# Altium PCB ESP_mudule.pcbdoc (part 2 of 4)
Units mm, origin at the board's own origin, x right, y up, seen from the top; angles counter-clockwise.
Board outline 109.8 x 135.65 mm, 2 copper layers (Top Layer, Bottom Layer); 176 components, 188 nets, 748 pads, 392 vias.
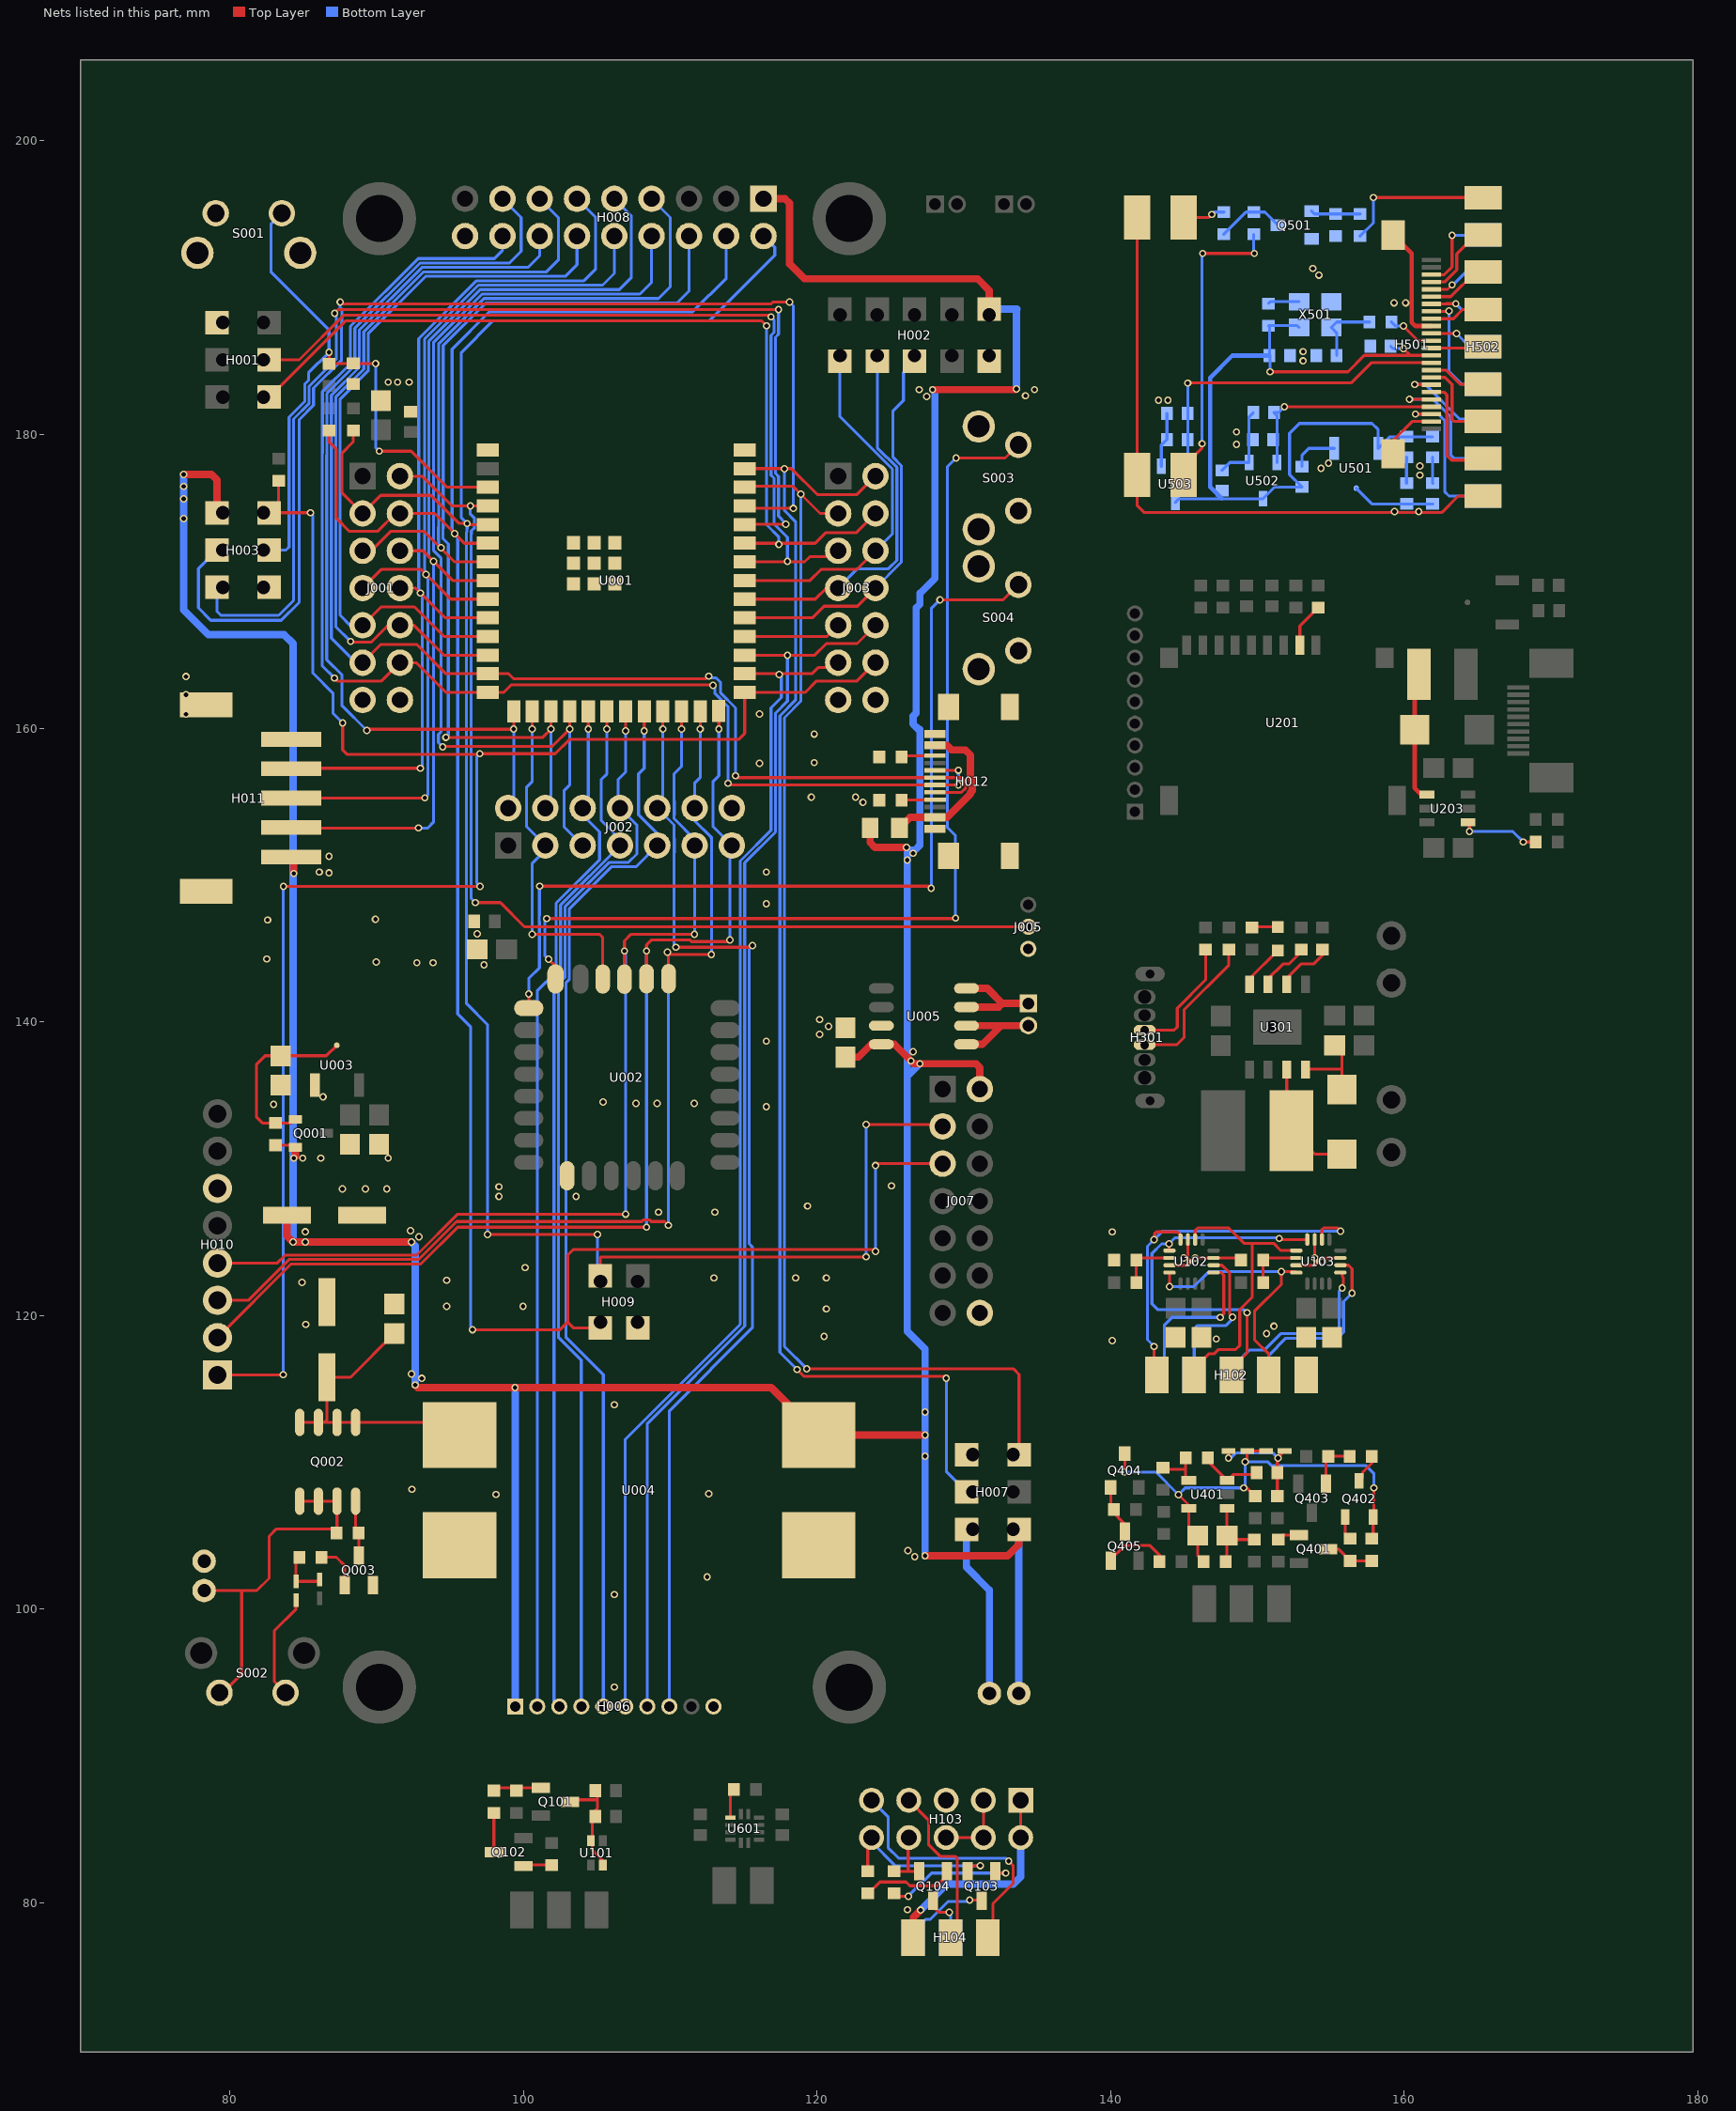
[diagram p2: the nets of this part, all layers, seen from the top]

## Via types
v1: diameter 0.5, hole 0.305, Top Layer to Bottom Layer, 390 vias
v2: diameter 0.61, hole 0.305, Top Layer to Bottom Layer, 2 vias

## Nets (pads, with @x,y where several pads share a name; then routed paths per layer and width w, separated by ;. In a path a pad name is that pad's centre, name@x,y a point inside that pad or via, vN(x,y) a via of type N, cw(c..) or ccw(c..) an arc to the next point about the centre after c; other vN are vias at no path point)
$1N5617: C007.2 Q001.1 R002.2 U003.2 | length 12.5
  Top Layer w0.2: Q001.1@84.481,133.362 84.228,133.109 R002.2@83.139,133.109 82.236,133.109 81.822,133.523 81.822,137.093 82.419,137.691 C007.2@83.474,137.691 86.588,137.691 U003.2@87.303,138.406
$1N9021: H007.2 L001.2 | length 11.8
  Bottom Layer w0.5: H007.2@130.203,105.449 130.17,105.417 130.17,102.872 131.742,101.3 L001.2@131.742,94.278
$1N9369: Q002.4 Q003.3 R003.1 | length 3.8
  Top Layer w0.2: Q002.4@88.585,107.36 88.585,105.403 R003.1@88.792,105.195 88.801,105.187 Q003.3@88.801,103.655
$1N9446: Q003.1 R004.1 | length 3.1
  Top Layer w0.2: R004.1@86.252,103.544 87.269,103.544 87.851,102.963 Q003.1@87.851,101.655
$1N9668: D001.1 D002.1 R004.2 | length 3.4
  Top Layer w0.2: R004.2@84.746,103.544 84.522,103.321 D002.1@84.522,101.897 86.011,101.897 D001.1@86.134,102.02
$1N9696: J004.1 Q002.1 Q002.2 Q002.3 R003.2 S002.1 | length 25
  Top Layer w0.2: J004.1@78.265,101.274 80.819,101.274 ; S002.1@79.312,94.322 79.545,94.322 80.819,95.596 80.819,101.274 ; Q002.1@84.775,107.36 Q002.2@86.045,107.36 Q002.3@87.315,107.36 87.315,105.225 R003.2@87.286,105.195 87.008,105.473 83.199,105.473 82.689,104.963 82.689,102.107 81.855,101.274 80.819,101.274
$1N18392: H012.A5 R008.2 | length 2.3
  Top Layer w0.2: R008.2@125.749,155.106 128.041,155.106 H012.A5@128.051,155.116
$1N18402: F001.2 H012.A4B9 H012.B4A9 | length 11.2
  Top Layer w0.5: F001.2@125.615,153.201 126.34,153.926 H012.A4B9@128.037,153.926 128.858,153.926 130.457,155.525 130.457,155.605 130.585,155.733 130.585,156.524 130.457,156.652 130.457,158.154 130.097,158.514 129.17,158.514 128.858,158.826 H012.B4A9@128.037,158.826
$1N18404: H012.B5 R009.2 | length 2.3
  Top Layer w0.2: R009.2@125.749,158.027 125.848,158.126 H012.B5@128.037,158.126
$1N20301: J006.1 U005.7 U005.8 | length 7.2
  Top Layer w0.5: U005.7@130.183,141.009 132.386,141.009 132.628,141.251 ; U005.8@130.183,142.279 131.6,142.279 132.628,141.251 ; J006.1@134.393,141.251 132.628,141.251
$1N20305: J006.2 U005.5 U005.6 | length 7.1
  Top Layer w0.5: U005.5@130.183,138.469 131.263,138.469 132.533,139.739 ; U005.6@130.183,139.739 132.533,139.739 ; J006.2@134.395,139.751 134.383,139.739 132.533,139.739
$1N20758: D002.2 S002.2 | length 7.2
  Top Layer w0.2: S002.2@83.812,94.322 83.046,95.088 83.046,98.537 84.522,100.013 D002.2@84.522,100.627
$2N358: C101.2 C102.2 Q101.3 U101.2 U101.5 | length 7.5
  Top Layer w0.2: Q101.3@103.188,86.896 103.319,87.027 105.059,87.027 ; C102.2@104.917,87.658 105.059,87.516 105.059,87.027 ; U101.2@105.421,82.578 105.421,82.884 104.702,83.603 104.702,86.102 105.059,86.459 105.059,87.027
$2N709: Q101.1 R101.1 R102.2 | length 3.3
  Top Layer w0.2: R102.2@97.997,87.649 98.194,87.846 Q101.1@101.188,87.846
$2N810: Q102.3 R102.1 | length 2.7
  Top Layer w0.2: R102.1@97.997,86.143 97.997,83.483 Q102.3@98.013,83.467
$2N897: Q102.1 R103.1 | length 1.9
  Top Layer w0.2: Q102.1@100.013,82.517 100.083,82.587 R103.1@101.934,82.587
$2N2003: R104.1 R105.1 U102.2 | length 3.8
  Top Layer w0.2: R105.1@141.742,122.253 R104.1@141.742,123.777 141.891,123.925 U102.2@144.005,123.925
$2N2005: R106.1 R107.1 U103.2 | length 3.8
  Top Layer w0.2: R107.1@150.378,122.253 R106.1@150.378,123.777 150.527,123.925 U103.2@152.641,123.925
$2N3190: Q103.1 R108.2 | length 9.1
  Top Layer w0.2: R108.2@125.237,80.654 125.432,80.459 v1(126.218,80.459) ; Q103.1@132.156,82.153 132.269,82.04 v1(132.856,82.04)
  Bottom Layer w0.2: v1(126.218,80.459) 127.799,82.04 v1(132.856,82.04)
$2N3194: Q104.1 R109.2 | length 6.4
  Top Layer w0.2: R109.2@123.459,80.654 123.505,80.654 124.28,81.428 126.065,81.428 126.32,81.173 128.157,81.173 128.854,81.87 Q104.1@128.854,82.153
$3N1120: D201.2 L201.2 U203.1 | length 8.9
  Top Layer w0.3: L201.2@160.994,163.668 160.7,163.374 D201.2@160.7,159.894 160.7,155.922 161.146,155.477 U203.1@161.537,155.477
$3N2623: R225.2 U203.4 | length 5.5
  Top Layer w0.2: U203.4@164.337,153.577 164.43,153.483 v1(164.43,152.957) ; v1(168.102,152.243) R225.2@168.93,152.243
  Bottom Layer w0.2: v1(164.43,152.957) 167.388,152.957 v1(168.102,152.243)
$3N5060: R201.2 U201.2 | length 3.1
  Top Layer w0.2: U201.2@152.882,165.638 152.882,166.955 R201.2@154.132,168.205
$4N871: Q401.1 R401.2 | length 1.5
  Top Layer w0.2: R401.2@151.416,104.75 151.714,105.049 Q401.1@152.813,105.049
$4N873: Q401.3 R402.1 R403.1 | length 3.3
  Top Layer w0.2: Q401.3@154.813,104.099 155.508,104.099 R403.1@156.312,103.295 R402.1@157.791,103.295
$4N875: Q402.1 R403.2 | length 1.6
  Top Layer w0.2: Q402.1@155.974,106.281 155.974,105.139 R403.2@156.312,104.801
$4N877: Q402.3 R404.2 | length 2
  Top Layer w0.2: Q402.3@156.924,108.751 157.165,108.992 157.165,109.334 157.779,109.949 R404.2@157.779,110.423
$4N879: Q403.1 R404.1 R405.2 | length 3.4
  Top Layer w0.2: Q403.1@154.661,108.567 154.661,110.263 R405.2@154.821,110.423 R404.1@156.273,110.423
$4N893: C401.2 D401.1 D403.2 R407.1 | length 7.5
  Top Layer w0.2: v1(148.027,110.303) D403.2@148.027,110.78 ; R407.1@151.365,107.708 151.351,107.722 C401.2@151.351,109.301 v1@151.351,110.284 ; v1(151.401,110.295) 151.391,110.284 v1@151.351,110.284 ; D401.1@151.847,110.78 v1@151.351,110.284
  Bottom Layer w0.2: v1(148.027,110.303) 148.188,110.303 148.545,110.66 151.036,110.66 v1(151.401,110.295)
$4N898: C402.1 R408.2 R409.1 U401.1 | length 5.6
  Top Layer w0.2: R408.2@147.833,103.232 147.921,103.32 U401.1@147.921,106.872 ; C402.1@147.927,105.017 148.194,104.75 R409.1@149.784,104.75
$4N903: R410.1 R413.2 U401.4 | length 3.2
  Top Layer w0.2: R413.2@143.562,109.646 143.681,109.527 145.103,109.527 ; R410.1@145.103,110.321 145.103,109.527 ; U401.4@145.321,108.772 145.103,108.989 145.103,109.527
$4N908: C402.2 D401.2 D403.1 Q402.2 Q404.3 R402.2 R406.2 R408.1 U401.5 | length 34.1
  Top Layer w0.2: v1(140.895,109.334) 140.961,109.399 Q404.3@140.961,110.604 ; v1(144.618,107.804) 145.321,107.102 U401.5@145.321,106.872 145.321,105.623 C402.2@145.927,105.017 145.927,103.632 R408.1@146.327,103.232 ; v1(149.055,108.263) 149.28,108.263 R406.2@149.835,107.708 ; v1(149.157,110.048) 149.297,110.187 D403.1@149.297,110.78 D401.2@150.577,110.78 ; R402.2@157.791,104.801 157.874,104.884 Q402.2@157.874,106.281 157.93,106.337 v1(157.93,108.263)
  Bottom Layer w0.2: v1(140.895,109.334) 143.088,109.334 v1(144.618,107.804) 145.077,108.263 v1(149.055,108.263) 149.157,108.365 v1(149.157,110.048) 150.687,110.048 150.942,109.793 157.369,109.793 157.93,109.232 v1(157.93,108.263)
$4N926: C401.1 R410.2 U401.3 | length 4.3
  Top Layer w0.2: R410.2@146.61,110.321 146.61,110.083 U401.3@147.921,108.772 148.33,109.181 149.831,109.181 C401.1@149.951,109.301
$4N1398: Q404.1 Q405.3 R411.2 | length 3.4
  Top Layer w0.2: Q404.1@140.011,108.304 140.011,106.751 140.961,105.801 Q405.3@140.961,105.303
$4N1499: Q405.1 R412.2 | length 4.5
  Top Layer w0.2: Q405.1@140.011,103.303 140.011,103.4 140.946,104.336 142.68,104.336 143.318,103.698 R412.2@143.318,103.232
$5N399: C302.1 D301.1 U301.4 | length 5.7
  Top Layer w0.2: U301.4@153.262,136.745 153.307,136.79 155.745,136.79 ; C302.1@155.253,138.394 155.745,137.902 155.745,136.79 ; D301.1@155.745,135.387 155.745,136.79
$5N401: D301.2 L301.1 U301.3 | length 8.4
  Top Layer w0.2: U301.3@151.992,136.745 151.992,132.903 L301.1@152.311,132.584 153.908,130.987 D301.2@155.745,130.987
$5N413: D206.2 R301.1 | length 1.8
  Top Layer w0.2: R301.1@149.629,146.42 149.673,146.464 D206.2@151.368,146.464
$5N415: D206.1 U301.8 | length 3.1
  Top Layer w0.2: U301.8@149.452,142.561 149.452,142.942 D206.1@151.373,144.864
$5N418: R302.2 U301.7 | length 3.5
  Top Layer w0.2: U301.7@150.722,142.561 150.722,142.929 151.73,143.937 152.138,143.937 152.995,144.794 R302.2@152.995,144.914
$5N420: R303.2 U301.6 | length 3.9
  Top Layer w0.2: U301.6@151.992,142.561 151.992,142.975 152.954,143.937 153.821,143.937 154.423,144.539 R303.2@154.423,144.914
$5N663: H301.3 R304.2 | length 10.1
  Top Layer w0.2: H301.3@142.314,138.434 144.492,138.434 144.998,138.939 144.998,140.826 148.048,143.876 R304.2@148.048,144.914
$5N667: H301.4 R305.2 | length 8.4
  Top Layer w0.2: H301.4@142.314,139.434 144.32,139.434 144.539,139.653 144.539,140.928 146.467,142.856 R305.2@146.467,144.914
$6N1076: R501.1 X501.1 | length 2.1
  Bottom Layer w0.2: R501.1@150.753,188.914 150.875,189.036 X501.1@152.828,189.036
$6N1779: L501.2 R502.2 | length 2.9
  Top Layer w0.2: L501.2@144.98,194.765 146.668,194.765 v1(146.88,194.977)
  Bottom Layer w0.2: v1(146.88,194.977) 147.04,195.137 R502.2@147.705,195.137
$6N1805: L502.2 R503.2 | length 20.5
  Top Layer w0.2: L502.2@144.98,177.239 144.98,177.827 146.226,179.073 v1(146.226,179.37) ; v1(146.268,192.325) v1(149.787,192.325)
  Bottom Layer w0.2: v1(146.226,179.37) 146.226,192.283 v1(146.268,192.325) ; R503.2@149.737,193.63 149.737,192.374 v1(149.787,192.325)
$6N1887: Q501.3 R502.1 R503.1 | length 4.7
  Bottom Layer w0.2: R502.1@147.705,193.63 149.212,195.137 R503.1@149.737,195.137 150.501,195.137 Q501.3@151.381,194.256
$6N1935: Q501.1 R504.2 R505.1 | length 3.4
  Bottom Layer w0.2: Q501.1@153.681,195.207 153.878,195.01 R504.2@155.325,195.01 R505.1@156.976,195.01
$6N2239: C513.2 R506.2 X501.3 | length 4.8
  Bottom Layer w0.2: C513.2@155.39,185.367 155.39,186.924 X501.3@155.029,187.286 155.396,187.653 R506.2@157.62,187.653
$7N310: R601.2 U601.1 | length 2
  Top Layer w0.2: U601.1@114.096,85.817 114.096,87.486 R601.2@114.344,87.734
+5V: C006.1 C012.1 F001.1 H002.10 H003.1 H006.1 H007.1 H008.1 H011.5 J007.2 L001.1 Q001.2 R002.1 U004.2 U005.4 | length 296.1
  Top Layer w0.2: R002.1@83.139,131.602 84.33,131.602 Q001.2@84.481,131.452
  Top Layer w0.5: v1(76.875,177.282) 78.762,177.282 79.149,176.894 H003.1@79.149,174.664 ; C006.1@83.908,126.842 83.908,125.419 v1(84.321,125.006) v1(85.157,125.006) v1(92.379,125.006) ; H011.5@84.209,151.233 84.372,151.07 v1(84.372,150.098) ; v1(84.372,130.718) 84.481,130.827 Q001.2@84.481,131.452 ; v1(92.634,115.265) 92.809,115.09 v1(99.439,115.09) 116.888,115.09 U004.2@120.119,111.859 v1(127.365,111.859) ; H008.1@116.36,196.045 117.833,196.045 118.134,195.744 118.134,191.613 119.154,190.593 130.935,190.593 131.727,189.801 H002.10@131.727,188.527 ; C012.1@121.948,137.596 122.819,137.596 123.692,138.469 U005.4@124.381,138.469 125.275,138.469 v1(126.406,137.339) 126.6,137.144 v1(127.008,137.144) 130.833,137.144 131.092,136.886 J007.2@131.092,135.421 ; F001.1@123.615,153.201 123.615,152.217 123.948,151.883 v1(126.09,151.883) ; v1(127.365,103.637) 132.975,103.637 133.759,104.42 H007.1@133.759,105.449 ; v1(127.875,183.045) 133.536,183.045 v1(133.587,183.096)
  Bottom Layer w0.5: v1(76.875,177.282) v1(76.875,176.46) v1(76.875,175.619) v1(76.875,174.267) 76.875,168.051 78.558,166.368 83.709,166.368 84.321,165.756 v1@84.321,150.047 ; v1(84.321,125.006) v1@84.321,130.667 ; v1(84.372,130.718) v1@84.321,130.667 ; v1(84.372,150.098) v1@84.321,150.047 ; v1(92.379,125.006) 92.634,124.751 v1(92.634,115.265) ; v1(99.439,115.09) 99.451,115.078 H006.1@99.451,93.385 ; v1(126.09,151.883) 126.141,151.832 v1@126.141,151.679 ; v1(127.008,137.144) 126.141,136.277 ; v1(127.365,103.637) v1(127.365,110.431) v1(127.365,111.859) v1(127.365,113.428) 127.365,117.713 126.141,118.937 126.141,136.277 ; v1(127.875,183.045) 128.028,182.892 128.028,170.193 127.008,169.173 127.008,168.44 126.75,168.182 126.75,161.024 126.55,160.824 126.55,160.284 126.932,159.902 127.008,159.902 127.008,152.036 126.651,151.679 v1@126.141,151.679 ; H002.10@131.727,188.527 133.613,188.527 133.587,188.501 v1(133.587,183.096) ; L001.1@133.744,94.278 133.744,105.434 H007.1@133.759,105.449 ; v1@84.321,130.667 v1@84.321,150.047 ; 126.141,136.277 v1(126.141,151.008) v1@126.141,151.679
  other v1: 126.651,103.586 126.192,103.994 93.093,115.724 92.379,116.03 92.889,125.363 85.157,125.705 92.328,125.771 84.984,130.718 126.549,137.96 86.769,150.142 86.106,150.2 86.769,151.271 126.549,151.475 127.467,182.586 134.199,182.637 126.957,183.045 134.811,183.045
+12V: C010.1 C011.2 Q002.5 Q002.6 Q002.7 Q002.8 U004.1 | length 20.2
  Top Layer w0.2: Q002.8@84.775,112.725 Q002.7@86.045,112.725 86.456,112.725 ; C011.2@91.219,118.784 88.236,115.801 C010.1@86.629,115.801 86.629,112.898 86.456,112.725 ; U004.1@95.659,111.859 94.793,112.725 Q002.5@88.585,112.725 Q002.6@87.315,112.725 86.456,112.725
BTN_DN: S004.2 U002.3 | length 61
  Top Layer w0.2: U002.3@100.371,140.932 v1(100.371,141.898) ; v1(101.114,149.241) 127.64,149.241 v1(127.781,149.1) ; v1(128.377,168.742) 132.69,168.742 S004.2@133.718,169.77
  Bottom Layer w0.2: v1(100.371,141.898) 100.371,142.95 101.1,143.679 101.1,146.816 101.094,146.822 101.094,147.238 101.1,147.244 101.1,149.227 v1(101.114,149.241) ; v1(127.781,149.1) 127.781,168.146 v1(128.377,168.742)
BTN_UP: S003.2 U002.2 | length 68.7
  Top Layer w0.2: v1(101.596,147.03) 129.404,147.03 v1(129.435,147.061) ; v1(101.727,144.259) 102.191,143.796 U002.2@102.191,142.922 ; v1(129.474,178.395) 132.818,178.395 S003.2@133.718,179.295
  Bottom Layer w0.2: v1(101.596,147.03) 101.457,146.891 101.457,144.529 v1(101.727,144.259) ; v1(129.435,147.061) 129.435,152.682 128.879,153.237 128.879,177.801 v1(129.474,178.395)
CAM_1V2: C509.1 C510.1 H501.10 U503.2 | length 22.9
  Top Layer w0.2: v1(145.248,183.501) 156.366,183.501 157.745,184.881 H501.10@161.833,184.881
  Bottom Layer w0.2: v1(145.248,183.501) 145.248,177.944 U503.2@145.353,177.839
CAM_2V8: C506.1 C507.1 H501.4 U502.2 | length 14.4
  Top Layer w0.2: v1(151.827,181.881) 160.54,181.881 160.544,181.885 160.96,181.885 160.964,181.881 H501.4@161.833,181.881
  Bottom Layer w0.2: U502.2@151.322,178.093 151.322,181.279 C506.1@151.114,181.487 151.433,181.487 v1(151.827,181.881)
CAM_3V3: C503.2 C504.2 C505.2 C508.2 C511.2 C512.1 H501.11 R501.2 U501.3 U502.3 U503.3 X501.4 | length 56.5
  Top Layer w0.2: v1(150.858,184.266) 156.162,184.266 157.276,185.381 160.403,185.381 ; v1(159.936,185.847) 160.403,185.381 ; H501.11@161.833,185.381 160.403,185.381
  Bottom Layer w0.2: U503.3@144.403,175.368 144.657,175.622 147.573,175.622 U502.3@150.372,175.622 151.161,176.412 C508.2@153.039,176.412 152.184,177.267 152.184,180.084 152.847,180.747 157.794,180.747 158.223,180.319 U501.3@158.223,179.049 159.018,179.844 C503.2@160.146,179.844 C504.2@161.929,179.844 ; v1(150.858,184.266) 150.858,185.324 C512.1@150.815,185.367 150.815,187.345 R501.2@150.753,187.407 152.707,187.407 X501.4@152.828,187.286 ; C505.2@159.073,186.002 159.228,185.847 v1(159.936,185.847)
  Bottom Layer w0.3: 147.573,175.622 146.778,176.417 146.778,183.858 148.286,185.367 C512.1@150.815,185.367
CAM_5V0: C501.2 C502.2 H502.1 L501.1 L502.1 U501.2 | length 49.5
  Top Layer w0.2: L501.1@141.795,194.765 L502.1@141.795,177.239 141.795,175.173 142.29,174.678 162.537,174.678 163.666,175.807 H502.1@165.353,175.807
  Bottom Layer w0.2: U501.2@156.723,176.336 157.791,175.269 C502.2@160.151,175.269 C501.2@161.935,175.269
  other v1: 159.337,174.741 160.983,174.741
CAM_D0: H501.19 H502.13 | length 4.2
  Top Layer w0.2: H501.19@161.833,189.38 163.163,189.38 164.83,191.047 H502.13@165.359,191.047
CAM_D1: H501.21 H502.15 | length 5.5
  Top Layer w0.2: H501.21@161.833,190.38 162.735,190.38 163.567,191.212 163.567,192.283 164.871,193.587 H502.15@165.359,193.587
CAM_D2: H501.22 H502.16 | length 5.9
  Top Layer w0.2: H501.22@161.833,190.881 162.725,190.881 163.251,191.407 v1(163.251,193.549)
  Bottom Layer w0.2: v1(163.251,193.549) 165.327,193.549 H502.16@165.366,193.587
CAM_D3: H501.20 H502.14 | length 4
  Top Layer w0.2: H501.20@161.833,189.881 162.949,189.881 v1(163.251,190.183)
  Bottom Layer w0.2: v1(163.251,190.183) 163.302,190.183 164.167,191.047 H502.14@165.366,191.047
CAM_D4: H501.18 H502.12 | length 3.7
  Top Layer w0.2: H501.18@161.833,188.881 161.849,188.897 162.836,188.897 162.839,188.9 163.255,188.9 163.258,188.897 v1(163.506,188.897)
  Bottom Layer w0.2: v1(163.506,188.897) 163.896,188.507 H502.12@165.359,188.507
CAM_D5: H501.16 H502.11 | length 3.8
  Top Layer w0.2: H501.16@161.833,187.881 163.346,187.881 163.973,188.507 H502.11@165.359,188.507
CAM_D6: H501.14 H502.10 | length 3.9
  Top Layer w0.2: H501.14@161.833,186.881 161.846,186.868 v1(163.549,186.868)
  Bottom Layer w0.2: v1(163.549,186.868) 164.45,185.967 H502.10@165.359,185.967
CAM_D7: H501.12 H502.9 | length 3.6
  Top Layer w0.2: H501.12@161.833,185.881 165.266,185.881 H502.9@165.353,185.967
CAM_GND: C501.1 C502.1 C503.1 C504.1 C505.1 C506.2 C507.2 C508.1 C509.2 C510.2 C511.1 C512.2 C513.1 H501.2 H501.15 H501.25 H501.26 H502.18 Q501.2 R504.1 U501.1 U502.1 U503.1 X501.2 | length 28
  Top Layer w0.2: H501.26@159.232,178.678 159.232,179.584 160.529,180.881 H501.2@161.833,180.881
  Top Layer w0.3: H501.25@159.232,193.579 160.497,192.313 160.497,187.633 160.749,187.38 H501.15@161.833,187.38
  Bottom Layer w0.2: U503.1@143.453,177.839 143.453,179.275 C509.2@143.83,179.652 C510.2@143.83,181.43 ; C511.1@147.578,177.558 148.113,178.093 U502.1@149.422,178.093 149.422,181.195 C506.2@149.714,181.487 ; C508.1@153.039,177.812 153.039,178.594 153.495,179.049 U501.1@155.223,179.049 ; C503.1@160.146,178.444 160.146,176.674 C502.1@160.151,176.669 ; C504.1@161.929,178.444 161.929,176.674 C501.1@161.935,176.669
  other v1: 161.058,177.228 154.326,177.687 161.058,177.848 154.836,178.044 148.563,179.319 148.563,180.165 143.259,182.328 143.894,182.328 153.102,185.006 153.102,185.643 159.291,188.959 160.089,188.959 154.173,190.846 153.765,191.305
CAM_HREF: H501.9 H502.7 | length 3.9
  Top Layer w0.2: H501.9@161.833,184.381 162.831,184.381 163.785,183.427 H502.7@165.353,183.427
CAM_PCLK: H501.17 H502.8 | length 8
  Top Layer w0.2: H501.17@161.833,188.38 163.03,188.38 v1(163.047,188.398)
  Bottom Layer w0.2: v1(163.047,188.398) 163.047,184.266 163.887,183.427 H502.8@165.359,183.427
CAM_PWDN: H501.8 H502.5 | length 6.2
  Top Layer w0.2: H501.8@161.833,183.881 162.77,183.881 163.251,183.399 163.251,181.002 163.367,180.887 H502.5@165.353,180.887
CAM_RESET: H501.6 H502.3 | length 7.9
  Top Layer w0.2: H501.6@161.833,182.881 162.699,182.881 162.894,182.685 162.894,178.554 163.2,178.248 165.254,178.248 H502.3@165.353,178.347
CAM_SIOC: H501.5 H502.4 | length 9.7
  Top Layer w0.2: v1(160.344,182.387) 161.825,182.387 H501.5@161.832,182.379
  Bottom Layer w0.2: v1(160.344,182.387) 161.969,182.387 163.149,181.206 163.149,178.605 163.408,178.347 H502.4@165.359,178.347
CAM_SIOD: H501.3 H502.2 | length 10.8
  Top Layer w0.2: v1(160.752,181.383) 161.831,181.383 H501.3@161.833,181.381
  Bottom Layer w0.2: v1(160.752,181.383) 162.31,181.383 162.741,180.951 162.741,176.106 163.041,175.807 H502.2@165.359,175.807
CAM_VSYNC: H501.7 H502.6 | length 6.8
  Top Layer w0.2: v1(160.701,183.399) 161.814,183.399 H501.7@161.833,183.381
  Bottom Layer w0.2: v1(160.701,183.399) 161.415,183.399 163.761,181.053 165.193,181.053 H502.6@165.359,180.887
CAM_XCLK: H501.13 R506.1 | length 3.2
  Top Layer w0.2: v1(159.936,187.378) 160.933,186.381 H501.13@161.833,186.381
  Bottom Layer w0.2: R506.1@159.127,187.653 159.402,187.378 v1(159.936,187.378)
CMA_LIGHT: H502.17 R505.2 | length 10.5
  Top Layer w0.2: v1(157.896,196.127) H502.17@165.359,196.127
  Bottom Layer w0.2: R505.2@156.976,193.503 157.896,194.423 v1(157.896,196.127)
DEBUG_3V3: H103.3 H103.4 H103.6 | length 5.1
  Top Layer w0.2: H103.6@128.793,84.455 H103.4@131.333,84.455 H103.3@131.333,86.995
DEBUG_5V0: H103.1 H103.2 H104.1 | length 15
  Top Layer w0.2: H103.2@133.873,84.455 H103.1@133.873,86.995
  Top Layer w0.5: H104.1@126.559,77.648 126.559,79.015 v1(127.06,79.516)
  Bottom Layer w0.5: v1(127.06,79.516) 128.826,81.282 133.373,81.282 133.873,81.782 H103.2@133.873,84.455
  other v1: 126.167,79.541
DEBUG_BOOT: H104.2 Q103.3 | length 6
  Top Layer w0.2: v1(130.4,80.204) 131.155,80.204 Q103.3@131.206,80.153
  Bottom Layer w0.2: H104.2@126.559,77.642 126.559,78.046 127.391,78.878 127.697,78.878 128.921,80.102 130.298,80.102 v1(130.4,80.204)
DEBUG_DTR: H103.10 Q103.2 R109.1 | length 11.8
  Top Layer w0.2: R109.1@123.459,82.16 123.459,84.201 H103.10@123.713,84.455 ; Q103.2@130.256,82.153 130.646,82.542 v1(131.114,82.542)
  Bottom Layer w0.2: H103.10@123.713,84.455 123.708,84.449 123.708,84.166 125.351,82.523 131.094,82.523 v1(131.114,82.542)
DEBUG_GND: H103.5 H104.6
DEBUG_RESEST: H104.4 Q104.3 | length 3.4
  Top Layer w0.2: Q104.3@127.904,80.153 127.904,79.742 128.274,79.372 v1(129,79.372)
  Bottom Layer w0.2: v1(129,79.372) 129.099,79.272 H104.4@129.099,77.642
DEBUG_RTS: H103.8 Q104.2 R108.1 | length 4
  Top Layer w0.2: R108.1@125.237,82.16 125.245,82.153 126.208,82.153 ; H103.8@126.253,84.455 126.208,84.41 126.208,82.153 ; Q104.2@126.954,82.153 126.208,82.153
DEBUG_RXD: H103.7 H104.3 | length 11.5
  Top Layer w0.2: H103.7@126.253,86.995 127.595,85.653 127.595,83.978 128.411,83.162 129.431,83.162 129.543,83.051 129.543,78.091 H104.3@129.099,77.648
DEBUG_TXD: H103.9 H104.5 | length 18.3
  Top Layer w0.2: H104.5@131.639,77.648 131.981,77.99 131.981,79.949 133.358,81.326 133.358,82.55 v1(133.052,82.856)
  Bottom Layer w0.2: H103.9@123.713,86.995 124.841,85.867 124.841,83.772 125.568,83.044 132.864,83.044 v1(133.052,82.856)
ESP_BOOT: H003.2 H010.1 J003.12 R007.1 U001.27 | length 123.2
  Top Layer w0.2: H010.1@79.181,115.957 83.636,115.957 v1(83.658,115.979) ; R007.1@83.34,176.832 83.34,175.299 82.705,174.664 v1(85.499,174.664) ; v1(83.669,149.231) v1(97.05,149.231) ; v1(87.695,160.351) 87.695,158.505 87.983,158.218 96.998,158.218 v1(97.039,158.259) 102.171,158.259 103.14,159.228 114.666,159.228 115.081,159.643 U001.27@115.081,162.431 119.196,162.431 119.97,163.206 122.731,163.206 J003.12@123.984,164.458
  Bottom Layer w0.2: v1(83.658,115.979) 83.658,149.22 v1(83.669,149.231) ; v1(85.499,174.664) 85.674,174.489 85.674,163.74 87.054,162.36 87.054,160.992 v1(87.695,160.351) ; v1(97.039,158.259) 96.839,158.059 96.839,149.442 v1(97.05,149.231)
ESP_IO1: H007.4 J003.2 U001.39 | length 91.5
  Top Layer w0.2: U001.39@115.081,177.671 118.255,177.671 ; 118.263,177.671 118.255,177.671 ; v1(118.646,116.321) 119.104,115.863 128.679,115.863 v1(128.806,115.736) ; J003.2@123.984,177.158 122.73,175.905 120.021,175.905 118.255,177.671
  Bottom Layer w0.2: v1(117.785,177.663) 117.785,174.826 118.542,174.069 118.542,161.903 117.475,160.836 117.475,117.492 v1(118.646,116.321) ; v1(128.806,115.736) 128.806,109.386 H007.4@130.203,107.989
ESP_IO2: H007.5 J003.3 U001.38 | length 87.9
  Top Layer w0.2: U001.38@115.081,176.401 115.22,176.401 115.304,176.485 118.348,176.485 v1(118.899,175.934) 120.215,174.618 J003.3@121.444,174.618 ; v1(119.298,116.381) 133.369,116.381 133.759,115.99 H007.5@133.759,110.529
  Bottom Layer w0.2: v1(118.899,175.934) 118.899,161.832 117.777,160.711 117.777,117.902 v1(119.298,116.381)
ESP_IO3: H008.15 J002.2 U001.15 | length 63.7
  Top Layer w0.2: v1(89.343,159.84) 89.43,159.926 99.34,159.926 v1(99.346,159.932) U001.15@99.346,161.151
  Bottom Layer w0.2: v1(89.343,159.84) 87.658,161.525 87.658,163.615 86.611,164.662 86.611,178.582 86.625,178.596 86.625,182.787 88.53,184.692 88.53,187.232 92.97,191.671 99.05,191.671 99.85,192.471 99.85,194.775 H008.15@98.58,196.045 ; J002.2@98.965,154.552 99.346,154.933 v1(99.346,159.932)
ESP_IO4: J001.2 J005.2 U001.4 | length 72.5
  Top Layer w0.2: J001.2@91.599,177.158 93.114,177.158 95.141,175.131 v1(96.393,175.131) U001.4@97.581,175.131 ; v1(96.737,148.121) 98.436,148.121 100.087,146.47 J005.2@134.394,146.47
  Bottom Layer w0.2: v1(96.393,175.131) 96.393,174.565 96.675,174.283 96.675,173.648 96.463,173.436 96.463,173.229 96.439,173.205 96.439,148.42 v1(96.737,148.121)
ESP_IO5: H008.2 H009.3 J001.3 J007.3 R006.1 U001.5 | length 146.9
  Top Layer w0.2: R006.1@88.42,180.261 88.42,179.49 87.658,178.728 87.658,176.02 J001.3@89.059,174.618 90.294,175.854 93.708,175.854 95.625,173.937 v1(96.173,173.937) 96.248,173.861 U001.5@97.581,173.861 ; v1(97.564,125.515) v1(105.057,125.515) ; H009.3@105.25,122.721 105.25,123.93 105.317,123.997 v1(123.345,123.997) ; v1(123.345,133.008) 128.425,133.008 J007.3@128.552,132.881
  Bottom Layer w0.2: v1(97.564,125.515) 97.564,139.813 96.137,141.24 96.137,173.33 96.161,173.354 96.161,173.561 96.173,173.573 v1(96.173,173.937) 95.786,174.324 95.786,185.586 97.945,187.745 112.677,187.745 117.122,192.19 117.122,192.743 H008.2@116.36,193.505 ; v1(105.057,125.515) 105.057,122.914 H009.3@105.25,122.721 ; v1(123.345,123.997) v1(123.345,133.008)
ESP_IO6: H008.4 H009.4 J001.4 J007.5 R005.1 U001.6 | length 154.4
  Top Layer w0.2: R005.1@86.769,180.261 86.769,179.49 87.277,178.982 87.277,174.283 88.166,173.394 90.071,173.394 91.295,174.618 J001.4@91.599,174.618 93.959,174.618 v1(95.333,173.245) 95.988,172.59 U001.6@97.579,172.59 ; v1(96.548,119.038) 102.517,119.038 103.025,119.546 ; H009.4@105.25,119.165 103.406,119.165 103.025,119.546 ; v1(123.98,124.372) 123.853,124.499 103.406,124.499 103.025,124.118 103.025,119.546 ; v1(123.98,130.214) 124.107,130.341 J007.5@128.552,130.341
  Bottom Layer w0.2: v1(96.548,119.038) 96.421,119.165 96.421,139.649 95.533,140.537 95.533,173.045 v1(95.333,173.245) 95.151,173.427 95.151,185.806 97.695,188.349 111.538,188.349 113.82,190.632 H008.4@113.82,193.505 ; v1(123.98,124.372) v1(123.98,130.214)
ESP_IO7: H008.7 J001.5 U001.7 | length 47.8
  Top Layer w0.2: J001.5@89.059,172.078 89.644,172.078 90.96,173.394 93.246,173.394 95.319,171.321 U001.7@97.581,171.321
  Bottom Layer w0.2: v1(94.395,172.292) 94.245,172.442 94.245,172.768 94.227,172.787 94.227,173.703 94.245,173.721 94.245,186.181 97.32,189.255 109.21,189.255 110.01,190.055 110.01,194.775 H008.7@108.74,196.045
ESP_IO8: H008.13 J001.10 U001.12 | length 53
  Top Layer w0.2: v1(88.244,165.9) 88.298,165.846 89.635,165.846 90.787,166.998 J001.10@91.599,166.998 92.564,166.998 94.591,164.971 U001.12@97.581,164.971
  Bottom Layer w0.2: v1(88.244,165.9) 87.229,166.915 87.229,182.536 89.134,184.441 89.134,186.981 93.22,191.067 101.59,191.067 102.39,191.867 102.39,194.775 H008.13@101.12,196.045
ESP_IO9: H008.6 J002.4 U001.17 | length 63.1
  Top Layer w0.2: v1(94.729,159.372) 101.325,159.372 v1(101.886,159.932) U001.17@101.886,161.151
  Bottom Layer w0.2: v1(94.729,159.372) 94.897,159.54 94.897,172.544 94.529,172.912 94.529,173.578 94.547,173.596 94.547,186.056 97.445,188.953 110.48,188.953 111.28,189.753 H008.6@111.28,193.505 ; J002.4@101.505,154.552 101.886,154.933 v1(101.886,159.932)
ESP_IO10: H008.8 J002.5 U001.18 | length 66.6
  Top Layer w0.2: v1(94.516,158.72) 94.557,158.761 101.984,158.761 v1(103.156,159.932) U001.18@103.156,161.151
  Bottom Layer w0.2: v1(94.516,158.72) 94.227,159.009 94.227,159.579 94.389,159.742 94.389,171.588 93.893,172.084 93.893,172.112 93.881,172.124 93.881,186.244 97.194,189.557 107.94,189.557 108.74,190.357 H008.8@108.74,193.505 ; v1(103.156,159.932) 103.156,156.126 102.771,155.741 102.771,153.287 J002.5@104.045,152.012
ESP_IO11: H006.2 J002.6 U001.19 | length 70.2
  Top Layer w0.2: v1(104.426,159.932) U001.19@104.426,161.151
  Bottom Layer w0.2: H006.2@100.95,93.385 100.95,142.109 102.234,143.393 102.234,148.077 105.198,151.04 105.198,152.934 104.045,154.086 J002.6@104.045,154.552 104.426,154.933 v1(104.426,159.932)
ESP_IO12: H006.3 J002.7 U001.20 | length 70.5
  Top Layer w0.2: v1(105.696,159.932) U001.20@105.696,161.151
  Bottom Layer w0.2: H006.3@102.451,93.385 102.088,93.748 102.088,142.705 102.536,143.153 102.536,147.952 106.585,152.001 J002.7@106.585,152.012 106.585,152.44 105.311,153.714 105.311,156.503 105.696,156.888 v1(105.696,159.932)
ESP_IO13: H006.4 J002.8 U001.21 | length 72.1
  Top Layer w0.2: v1(106.966,159.805) U001.21@106.966,161.151
  Bottom Layer w0.2: H006.4@103.95,93.385 103.95,116.971 102.39,118.53 102.39,142.579 102.838,143.027 102.838,147.826 105.871,150.86 107.166,150.86 107.738,151.432 107.738,153.4 J002.8@106.585,154.552 106.454,154.684 106.454,156.503 106.966,157.015 v1(106.966,159.805)
ESP_IO14: H006.5 J002.9 U001.22 | length 73.1
  Top Layer w0.2: v1(108.236,159.805) U001.22@108.236,161.151
  Bottom Layer w0.2: H006.5@105.451,93.385 105.451,115.978 102.898,118.53 102.898,142.66 103.14,142.902 103.14,147.701 105.997,150.558 107.671,150.558 J002.9@109.125,152.012 109.125,152.816 107.851,154.09 107.851,156.884 108.236,157.269 v1(108.236,159.805)
ESP_IO15: H008.9 H011.4 J001.6 U001.8 | length 71
  Top Layer w0.2: H011.4@84.209,153.234 84.242,153.201 v1(92.865,153.201) ; J001.6@91.599,172.078 93.165,172.078 v1(93.881,171.362) 95.192,170.051 U001.8@97.581,170.051
  Bottom Layer w0.2: v1(92.865,153.201) 93.5,153.201 93.881,153.582 v1(93.881,171.362) 93.579,171.664 93.579,186.369 97.069,189.859 106.543,189.859 107.343,190.659 107.343,193.018 107.352,193.028 107.352,194.893 H008.9@106.2,196.045
ESP_IO16: H008.10 H011.3 J001.7 U001.9 | length 67.7
  Top Layer w0.2: H011.3@84.209,155.233 93.281,155.233 v1(93.297,155.25) ; J001.7@89.059,169.538 90.325,170.805 93.042,170.805 v1(93.379,170.467) 95.065,168.781 U001.9@97.581,168.781
  Bottom Layer w0.2: v1(93.297,155.25) 93.5,155.453 93.5,170.346 v1(93.379,170.467) 93.277,170.569 93.277,186.494 96.944,190.161 105.4,190.161 106.2,190.961 H008.10@106.2,193.505
ESP_IO17: H008.11 H011.2 J001.8 U001.10 | length 64.4
  Top Layer w0.2: H011.2@84.209,157.232 84.242,157.265 v1(92.998,157.265) ; J001.8@91.599,169.538 92.663,169.538 v1(92.998,169.203) 94.69,167.511 U001.10@97.581,167.511
  Bottom Layer w0.2: v1(92.998,157.265) 93.114,157.382 93.114,169.087 v1(92.998,169.203) 92.877,169.324 92.877,186.521 96.819,190.463 104.13,190.463 104.93,191.263 104.93,194.775 H008.11@103.66,196.045
ESP_IO18: H008.12 J001.9 U001.11 | length 49.8
  Top Layer w0.2: J001.9@89.059,166.998 90.315,168.255 92.583,168.255 94.596,166.241 U001.11@97.581,166.241
  Bottom Layer w0.2: J001.9@89.059,166.998 88.212,166.998 87.531,167.679 87.531,182.411 89.436,184.316 89.436,186.856 93.345,190.765 102.86,190.765 103.66,191.565 H008.12@103.66,193.505
ESP_IO19: H008.14 H012.A7 H012.B7 J001.11 U001.13 | length 92
  Top Layer w0.2: J001.11@89.059,164.458 90.305,165.705 92.736,165.705 94.739,163.701 U001.13@97.581,163.701 99.002,163.701 99.342,163.361 112.443,163.361 v1(112.623,163.542) ; v1(114.455,156.757) 114.586,156.626 H012.A7@128.037,156.626 128.851,156.626 128.855,156.63 129.839,156.63 130.133,156.336 130.133,155.92 129.839,155.626 H012.B7@128.037,155.626
  Bottom Layer w0.2: J001.11@89.059,164.458 88.593,164.458 86.927,166.124 86.927,182.662 88.832,184.567 88.832,187.107 93.095,191.369 100.32,191.369 101.12,192.169 H008.14@101.12,193.505 ; v1@112.677,163.625 112.677,163.552 112.55,163.425 113.122,163.425 113.439,163.107 113.439,162.391 114.455,161.375 v1(114.455,156.757)
ESP_IO20: H008.16 H012.A6 H012.B6 J001.12 U001.14 | length 91.4
  Top Layer w0.2: v1(87.144,163.407) 87.346,163.206 90.346,163.206 J001.12@91.599,164.458 92.707,164.458 94.734,162.431 U001.14@97.581,162.431 98.666,162.431 99.168,162.933 112.903,162.933 v1(112.92,162.916) ; v1(113.947,156.249) 114.07,156.126 H012.A6@128.037,156.126 129.629,156.126 v1(129.631,156.128) ; H012.B6@128.037,157.126 129.625,157.126 v1(129.631,157.132)
  Bottom Layer w0.2: v1(87.144,163.407) 86.309,164.242 86.309,178.707 86.323,178.721 86.323,182.912 88.228,184.817 88.228,187.357 92.845,191.973 98.028,191.973 98.58,192.525 H008.16@98.58,193.505 ; v1(112.92,162.916) 113.058,162.778 113.058,162.345 113.947,161.456 v1(113.947,156.249) ; v1(129.631,156.128) v1(129.631,157.132)
ESP_IO21: H006.8 J002.10 U001.23 | length 76.6
  Top Layer w0.2: v1(109.506,159.932) U001.23@109.506,161.151 ; v1(110.391,145.079) 115.478,145.079 v1(115.598,145.199)
  Bottom Layer w0.2: v1(109.506,159.932) 109.506,154.933 J002.10@109.125,154.552 110.264,153.414 110.264,152.503 110.278,152.49 110.278,151.535 110.264,151.522 110.264,145.206 v1(110.391,145.079) ; H006.8@109.949,93.385 109.949,113.516 115.598,119.165 115.598,124.678 115.38,124.896 115.38,145.134 115.547,145.301 115.547,145.25 v1(115.598,145.199)
ESP_IO35: H006.6 J003.11 U001.28 | length 81.4
  Top Layer w0.2: U001.28@115.081,163.701 119.65,163.701 120.072,164.124 121.109,164.124 J003.11@121.444,164.458
  Bottom Layer w0.2: H006.6@106.949,93.385 106.949,111.579 114.776,119.406 114.776,150.954 116.871,153.049 116.871,161.382 117.573,162.084 117.573,163.501 v1(117.434,163.64)
ESP_IO36: H006.7 J003.10 U001.29 | length 85.3
  Top Layer w0.2: U001.29@115.081,164.971 119.849,164.971 120.633,165.756 122.741,165.756 J003.10@123.984,166.998
  Bottom Layer w0.2: H006.7@108.45,93.385 108.45,112.653 115.078,119.28 115.078,150.829 117.173,152.924 117.173,161.021 117.991,161.838 v1(117.991,164.961)
ESP_IO37: J003.9 U001.30 | length 6.7
  Top Layer w0.2: U001.30@115.081,166.241 120.687,166.241 J003.9@121.444,166.998
ESP_IO38: H002.5 J003.8 U001.31 | length 26.7
  Top Layer w0.2: U001.31@115.081,167.511 119.686,167.511 120.48,168.306 122.751,168.306 J003.8@123.984,169.538
  Bottom Layer w0.2: J003.8@123.984,169.538 125.741,171.295 125.741,177.886 125.179,178.447 125.179,181.6 125.89,182.311 125.89,184.214 H002.5@126.647,184.971
ESP_IO39: H002.3 J003.7 U001.32 | length 25.6
  Top Layer w0.2: U001.32@115.081,168.781 119.885,168.781 120.642,169.538 J003.7@121.444,169.538
  Bottom Layer w0.2: J003.7@121.444,169.538 122.76,170.854 124.873,170.854 125.439,171.42 125.439,177.761 124.107,179.092 H002.3@124.107,184.971
ESP_IO40: H002.1 J003.6 U001.33 | length 24.6
  Top Layer w0.2: U001.33@115.081,170.051 119.523,170.051 120.276,170.805 122.71,170.805 J003.6@123.984,172.078
  Bottom Layer w0.2: H002.1@121.567,184.971 121.567,181.205 125.137,177.636 125.137,173.231 J003.6@123.984,172.078
ESP_IO41: H001.3 J003.5 U001.34 | length 59.4
  Top Layer w0.2: H001.3@82.705,185.078 84.737,185.078 87.785,188.126 116.754,188.126 v1(116.875,188.005) ; U001.34@115.081,171.321 119.161,171.321 119.511,171.672 121.037,171.672 J003.5@121.444,172.078
  Bottom Layer w0.2: v1(116.875,188.005) 117.075,187.805 117.075,186.952 116.867,186.744 116.867,177.223 117.075,177.015 117.075,173.904 117.991,172.988 v1(117.991,171.362)
ESP_IO42: H001.1 J003.4 U001.35 | length 61.1
  Top Layer w0.2: H001.1@82.705,182.538 87.912,187.745 116.213,187.745 v1(116.565,187.394) ; U001.35@115.081,172.591 119.87,172.591 120.582,173.304 122.669,173.304 J003.4@123.984,174.618
  Bottom Layer w0.2: v1(116.565,187.394) 116.565,173.853 117.406,173.012 v1(117.406,172.502)
ESP_IO45: H010.2 J002.13 U001.26 U002.31 | length 75.7
  Top Layer w0.2: H010.2@79.181,118.497 84.198,123.514 93.023,123.514 95.526,126.017 v1(108.391,126.017) ; U002.31@108.391,142.932 v1(108.391,144.819) 108.391,145.232 108.74,145.581 111.338,145.581 111.453,145.466 113.959,145.466 v1(114.074,145.581) ; v1(113.316,159.932) U001.26@113.316,161.181
  Bottom Layer w0.2: v1(108.391,126.017) v1(108.391,144.819) ; v1(113.316,159.932) 113.316,156.761 112.931,156.376 112.931,153.287 J002.13@114.205,152.012 114.074,151.881 v1(114.074,145.581)
ESP_IO46: J002.3 U001.16 U002.33 | length 24
  Top Layer w0.2: v1(100.598,145.968) 105.179,145.968 105.411,145.737 U002.33@105.411,142.912 ; v1(100.612,159.932) 100.616,159.936 U001.16@100.616,161.151
  Bottom Layer w0.2: v1(100.598,145.968) 100.598,150.769 101.505,151.677 J002.3@101.505,152.012 100.231,153.287 100.231,155.995 100.612,156.376 v1(100.612,159.932)
ESP_IO47: H010.4 J002.11 U001.24 U002.32 | length 70.7
  Top Layer w0.2: H010.4@79.181,123.577 83.249,123.577 83.79,124.118 92.738,124.118 95.526,126.906 v1(106.962,126.906) ; U002.32@106.891,142.902 v1(106.891,144.819) 106.891,145.51 107.349,145.968 v1(111.661,145.968) ; v1(110.776,159.932) U001.24@110.776,161.151
  Bottom Layer w0.2: v1(106.891,144.819) 106.962,144.748 v1(106.962,126.906) ; v1(110.776,159.932) 110.776,157.396 110.264,156.884 110.264,155.043 110.278,155.03 110.278,154.075 110.264,154.062 110.264,153.841 111.665,152.44 J002.11@111.665,152.012 111.661,152.008 v1(111.661,145.968)
ESP_IO48: H010.3 J002.12 U001.25 U002.30 | length 73.7
  Top Layer w0.2: H010.3@79.181,121.037 81.27,121.037 84.049,123.816 92.863,123.816 95.451,126.404 108.068,126.404 108.183,126.519 108.599,126.519 108.714,126.404 109.629,126.404 v1(109.883,126.15) ; v1(109.81,144.739) v1@109.891,144.658 ; U002.30@109.891,142.935 v1@109.891,144.658 ; v1(112.046,159.932) U001.25@112.046,161.151 ; v1(112.804,144.577) 109.971,144.577 v1@109.891,144.658
  Bottom Layer w0.2: v1(109.81,144.739) 109.883,144.665 v1(109.883,126.15) ; v1(112.046,159.932) 112.046,156.634 111.661,156.249 111.661,154.557 J002.12@111.665,154.552 111.665,153.705 112.804,152.566 112.804,152.503 112.818,152.49 112.818,144.591 v1(112.804,144.577)
ESP_RESET: C003.2 H003.4 R001.1 S001.1 U001.3 | length 45.6
  Top Layer w0.2: v1(86.769,185.586) R001.1@86.769,184.816 88.402,184.816 88.411,184.824 v1(89.944,184.824) ; v1(90.198,178.855) 92.357,178.855 94.811,176.401 U001.3@97.581,176.401
  Bottom Layer w0.2: H003.4@82.705,172.124 83.848,172.124 84.054,172.33 84.054,181.174 85.115,182.235 85.115,183.412 85.372,183.669 85.372,184.189 v1(86.769,185.586) 86.769,187.11 82.832,191.047 82.832,194.337 S001.1@83.558,195.063 ; v1(89.944,184.824) 89.944,179.109 v1(90.198,178.855)
ESP_RXD: H003.5 U001.36 | length 76.3
  Top Layer w0.2: v1(87.15,188.253) 87.404,188.507 v1(117.377,188.507) ; U001.36@115.081,173.861 115.097,173.877 v1(117.871,173.877)
  Bottom Layer w0.2: H003.5@79.149,169.584 79.149,167.933 79.403,167.679 83.34,167.679 84.356,168.695 84.356,181.049 85.417,182.11 85.417,183.287 87.277,185.147 87.277,188.126 v1(87.15,188.253) ; v1(117.377,188.507) 117.377,186.827 117.169,186.619 117.169,177.348 117.377,177.14 117.377,174.434 117.871,173.94 v1(117.871,173.877)
ESP_TXD: H003.3 U001.37 | length 82.1
  Top Layer w0.2: v1(87.531,189.015) 87.658,188.888 116.868,188.888 116.995,189.015 v1(118.138,189.015) ; U001.37@115.081,175.131 115.25,174.963 v1(118.392,174.963)
  Bottom Layer w0.2: H003.3@79.149,172.124 77.879,170.854 77.879,168.187 78.72,167.346 83.515,167.346 84.737,168.568 84.737,181.003 85.719,181.985 85.719,183.162 87.624,185.067 87.624,187.607 87.658,187.641 87.658,188.507 87.531,188.634 v1(87.531,189.015) ; v1(118.138,189.015) 118.392,188.761 v1(118.392,174.963)
GND: C001.2 C002.2 C003.1 C004.1 C005.1 C006.2 C007.1 C008.1 C009.1 C010.2 C011.1 C012.2 H001.6 H002.9 H003.6 H006.10 H007.6 H008.18 H009.2 H010.6 H011.1 H011.6 H011.7 H012.13 H012.14 H012.15 H012.16 H012.A1B12 H012.B1A12 J001.13 J001.14 J002.14 J003.13 J003.14 J004.2 J005.3 J007.14 Q003.2 R008.1 R009.1 S001.2 S001.3 S001.4 S003.1 S003.3 S003.4 S004.1 S004.3 S004.4 U001.1 U001.40 U001.41 U002.11 U003.1 U004.3 U004.4 U005.3
  other v1: 106.2,94.705 106.2,101.003 112.524,102.209 98.142,107.819 112.626,107.87 92.423,108.168 106.2,113.921 120.48,118.58 85.188,119.396 120.636,120.452 94.776,120.628 99.978,120.62 84.933,122.252 94.776,122.405 112.983,122.558 118.542,122.558 120.636,122.558 100.131,123.272 109.209,127.046 113.042,127.046 119.358,127.454 98.343,128.117 103.599,128.117 87.687,128.627 89.255,128.627 90.71,128.627 98.343,128.769 125.07,128.831 86.208,130.718 90.798,130.718 116.553,134.221 82.995,134.39 107.679,134.441 109.119,134.441 111.631,134.441 105.435,134.543 86.361,134.9 116.553,138.678 120.174,139.148 120.786,139.694 120.174,140.153 97.326,143.876 92.75,144.029 93.858,144.029 89.982,144.08 82.536,144.284 96.861,145.996 82.587,146.936 89.931,146.987 116.553,148.043 116.553,150.2 123.132,154.943 119.613,155.301 122.622,155.301 116.094,157.596 119.817,157.647 119.817,159.595 77.028,160.948 116.094,160.963 77.028,162.28 77.028,163.512 90.798,183.555 91.438,183.555 92.218,183.555
HT517_BLCK: H102.1 U102.16 U103.14 | length 27.3
  Top Layer w0.2: v1(142.959,117.898) 142.959,116.144 H102.1@143.148,115.956 ; v1(142.959,125.177) 143.001,125.219 143.001,125.59 143.112,125.702 144.54,125.702 144.756,125.486 U102.16@144.756,125.177 ; U103.14@154.391,125.177 154.391,125.862 154.499,125.97 155.441,125.97 v1(155.659,125.753)
  Bottom Layer w0.2: v1(142.959,117.898) 142.504,118.353 142.504,124.722 v1(142.959,125.177) 143.535,125.753 v1(155.659,125.753)
HT517_CN1_N: H102.4 U102.10 | length 10.6
  Top Layer w0.2: U102.10@147.007,123.427 147.58,123.427 148.11,122.896 148.11,120.072 v1(148.287,119.895)
  Bottom Layer w0.2: H102.4@145.688,115.949 145.688,119.097 145.917,119.326 147.855,119.326 148.287,119.758 v1(148.287,119.895)
HT517_CN1_P: H102.2 U102.9 | length 11.6
  Top Layer w0.2: U102.9@147.007,122.927 147.519,122.927 147.702,122.743 147.702,120.122 v1(147.458,119.878)
  Bottom Layer w0.2: H102.2@143.148,115.949 143.468,115.949 143.668,116.149 143.668,119.372 144.174,119.878 v1(147.458,119.878)
HT517_CN2_N: H102.8 U103.10 | length 12.5
  Top Layer w0.2: U103.10@155.643,123.427 156.199,123.427 156.44,123.186 v1(156.44,121.524)
  Bottom Layer w0.2: H102.8@150.768,115.949 150.768,117.292 151.936,118.459 155.455,118.459 155.863,118.867 155.863,120.946 v1(156.44,121.524)
HT517_CN2_P: H102.6 U103.9 | length 13
  Top Layer w0.2: U103.9@155.643,122.927 155.769,122.801 155.769,122.665 155.84,122.593 155.84,122.177 155.769,122.105 v1(155.769,121.873)
  Bottom Layer w0.2: H102.6@148.228,115.949 148.228,116.435 149.436,117.643 150.456,117.643 151.579,118.765 155.251,118.765 155.557,119.071 155.557,121.661 v1(155.769,121.873)
HT517_DIN: H102.5 U102.1 U103.16 | length 26.4
  Top Layer w0.2: v1(143.979,124.885) 143.979,124.451 U102.1@144.005,124.425 ; H102.5@148.228,115.956 148.228,116.384 149.291,117.447 v1(149.291,120.191) ; v1(151.477,125.251) 151.55,125.177 U103.16@153.392,125.177
  Bottom Layer w0.2: v1(149.291,120.191) 149.085,120.397 143.214,120.397 142.806,120.805 142.806,124.222 143.469,124.885 v1(143.979,124.885) 144.387,125.293 151.434,125.293 v1(151.477,125.251)
HT517_EN: H102.7 U102.4 U103.4 | length 18.2
  Top Layer w0.2: v1(144.005,121.978) U102.4@144.005,122.927 ; H102.7@150.768,115.956 150.768,117.383 149.793,118.357 149.793,120.295 151.63,122.131 v1(151.63,122.987) 152.581,122.987 U103.4@152.641,122.927
  Bottom Layer w0.2: v1(144.005,121.978) 145.674,121.978 146.682,122.987 v1(151.63,122.987)
HT517_GND: C103.1 C104.1 C105.1 C106.1 H102.9 R104.2 R106.2 U102.3 U102.11 U102.15 U102.17 U103.3 U103.11 U103.15 U103.17 | length 11.6
  Top Layer w0.2: U102.3@144.005,123.427 145.257,123.427 U102.17@145.506,123.676 ; U102.15@145.257,125.177 145.257,123.925 U102.17@145.506,123.676 ; R106.2@148.871,123.777 148.723,123.925 U102.11@147.007,123.925 v1(145.755,123.925) U102.17@145.506,123.676 ; U103.3@152.641,123.427 153.893,123.427 U103.17@154.142,123.676 ; U103.15@153.893,125.177 v1(153.893,123.925) U103.17@154.142,123.676 ; U103.11@155.643,123.925 154.391,123.925 U103.17@154.142,123.676
  other v1: 140.103,118.298 147.192,118.408 150.609,118.765 151.119,119.275 154.453,123.676 144.974,123.925 140.103,125.702
HT517_LRCK: H102.3 U102.14 U103.1 | length 19.7
  Top Layer w0.2: H102.3@145.688,115.956 145.688,116.394 146.682,117.388 147.039,117.388 147.345,117.694 148.518,117.694 148.789,117.965 148.789,120.399 149.64,121.25 149.64,124.924 ; U102.14@145.755,125.177 145.755,125.794 145.931,125.97 148.026,125.97 149.072,124.924 149.64,124.924 ; U103.1@152.641,124.425 151.592,124.425 151.093,124.924 149.64,124.924